# Altium PCB PCB1.PcbDoc
Units mil, origin at the board's own origin, x right, y up, seen from the top; angles counter-clockwise.
Board outline 4724.41 x 5511.81 mil, 4 copper layers (Top Layer, Layer 1, Layer 2, Bottom Layer), stack 23.756 mil thick; 86 components, 83 nets, 358 pads, 500 vias.
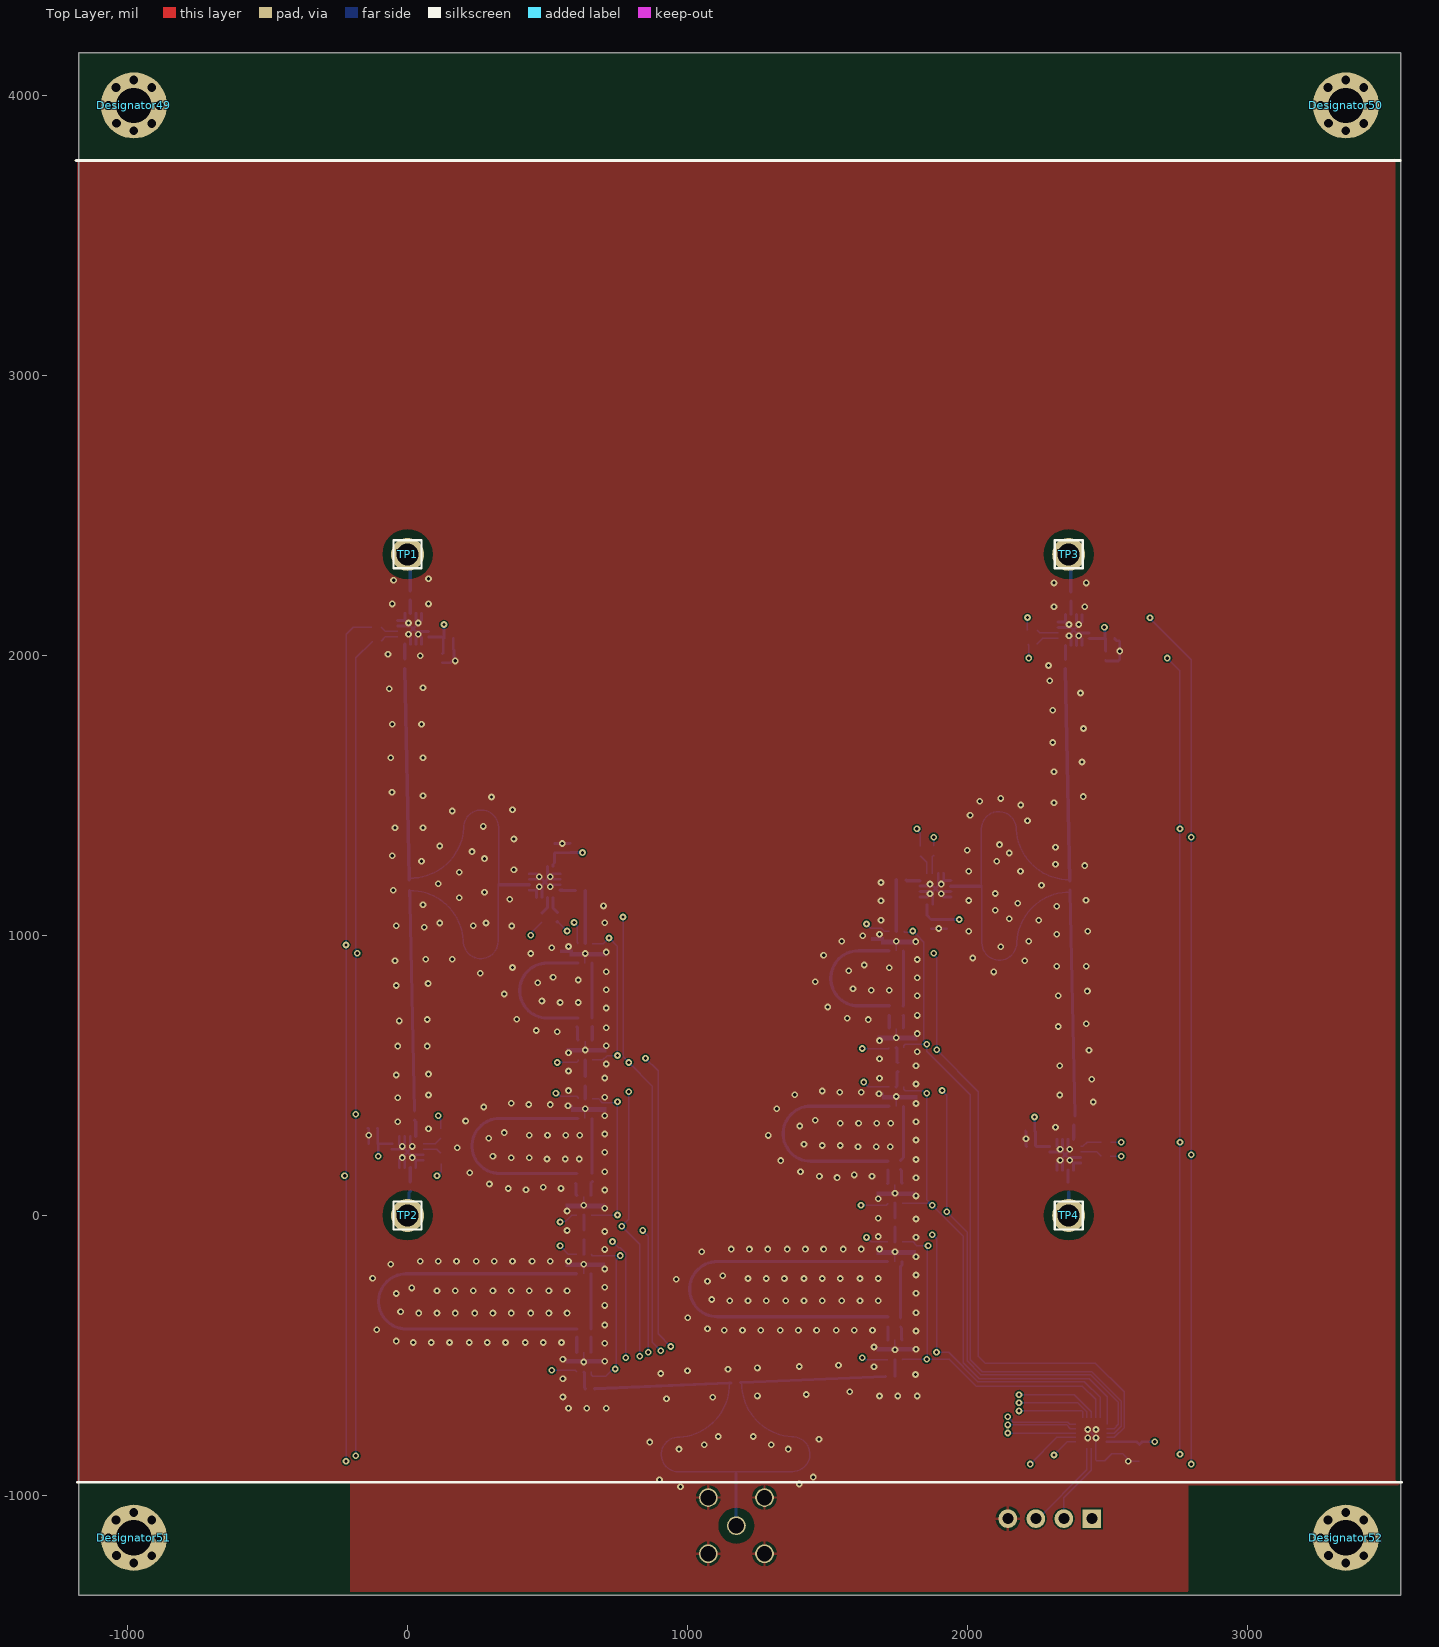
[diagram p0: Top Layer view]
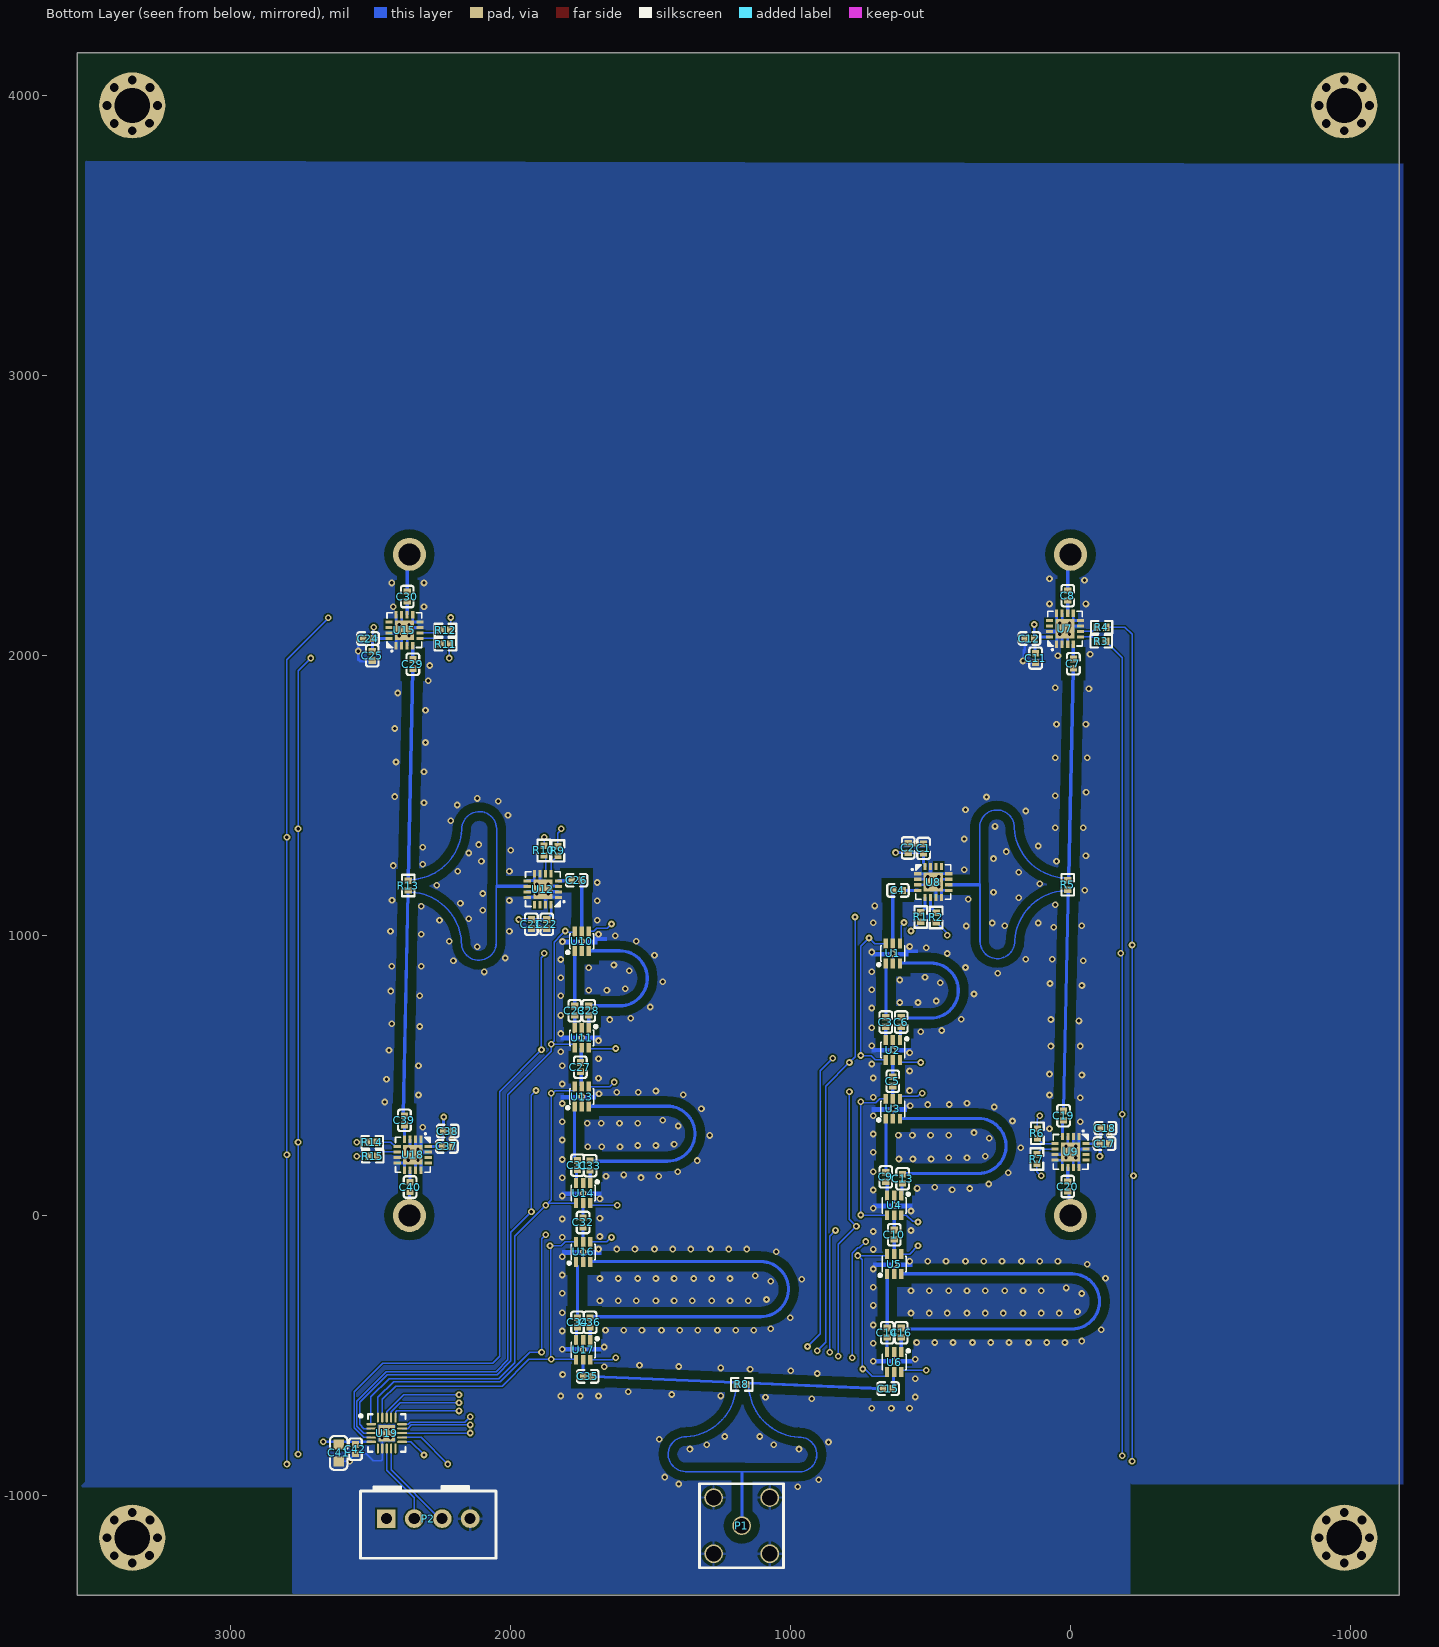
[diagram p1: Bottom Layer view, seen from below]
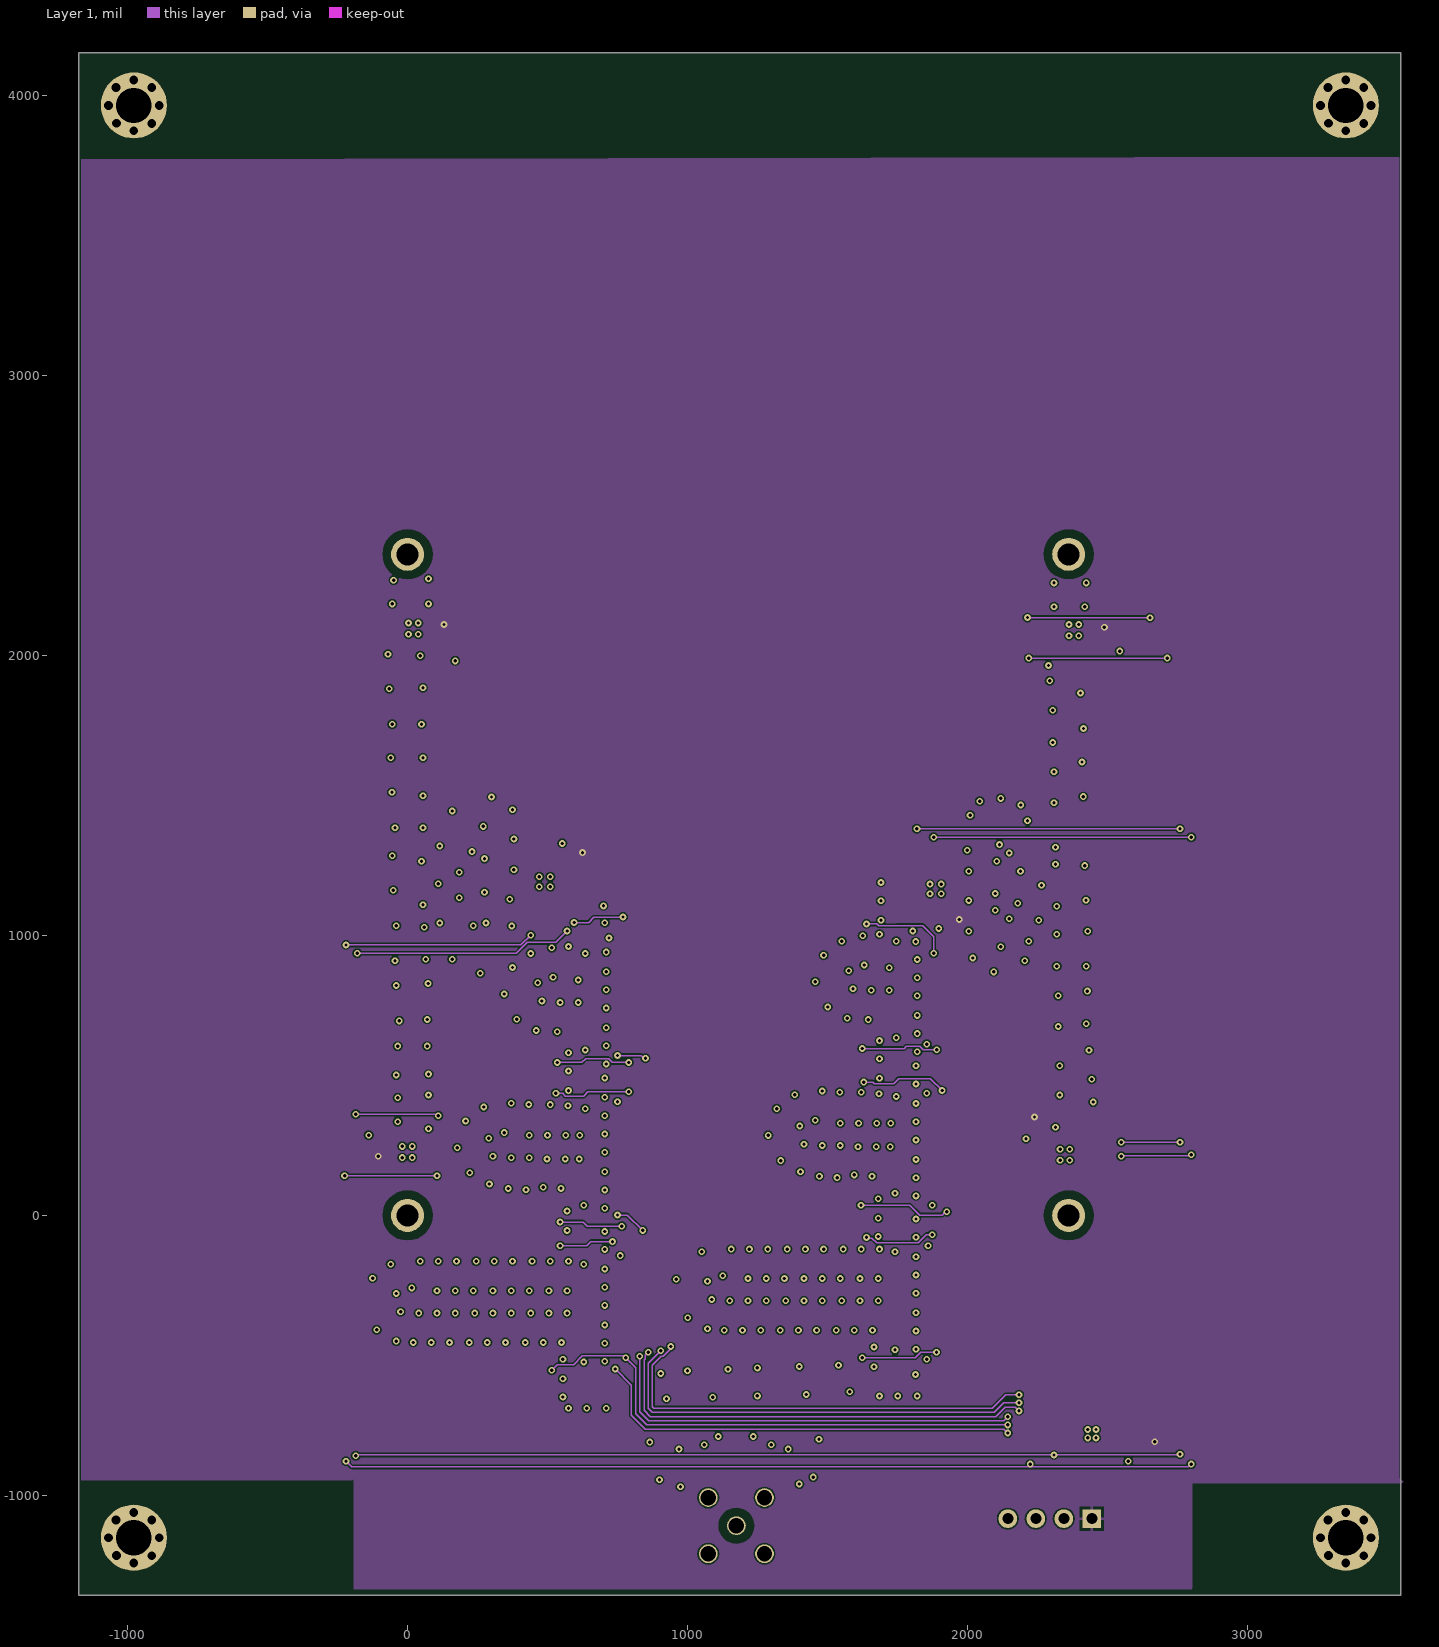
[diagram p2: Layer 1]
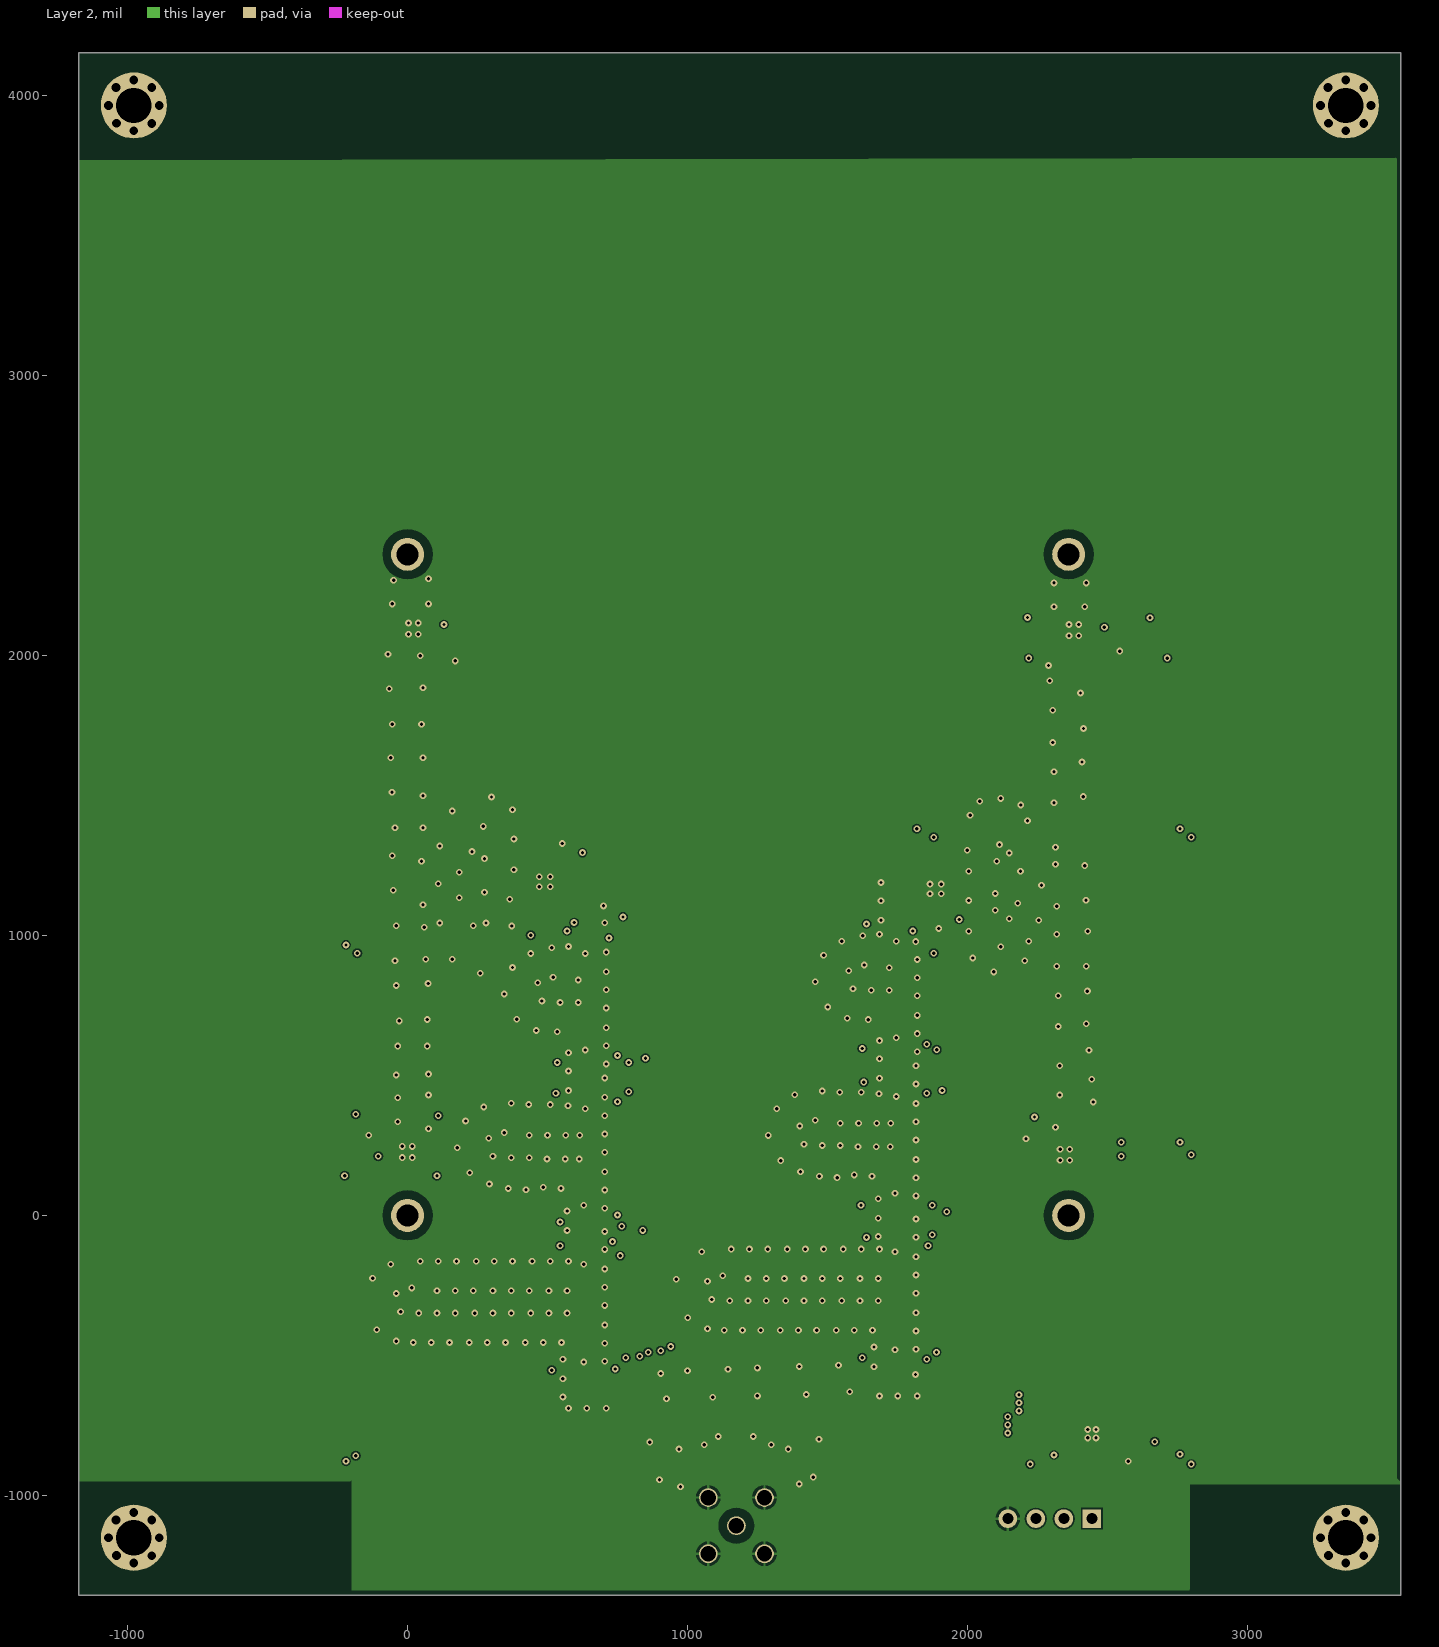
[diagram p3: Layer 2]
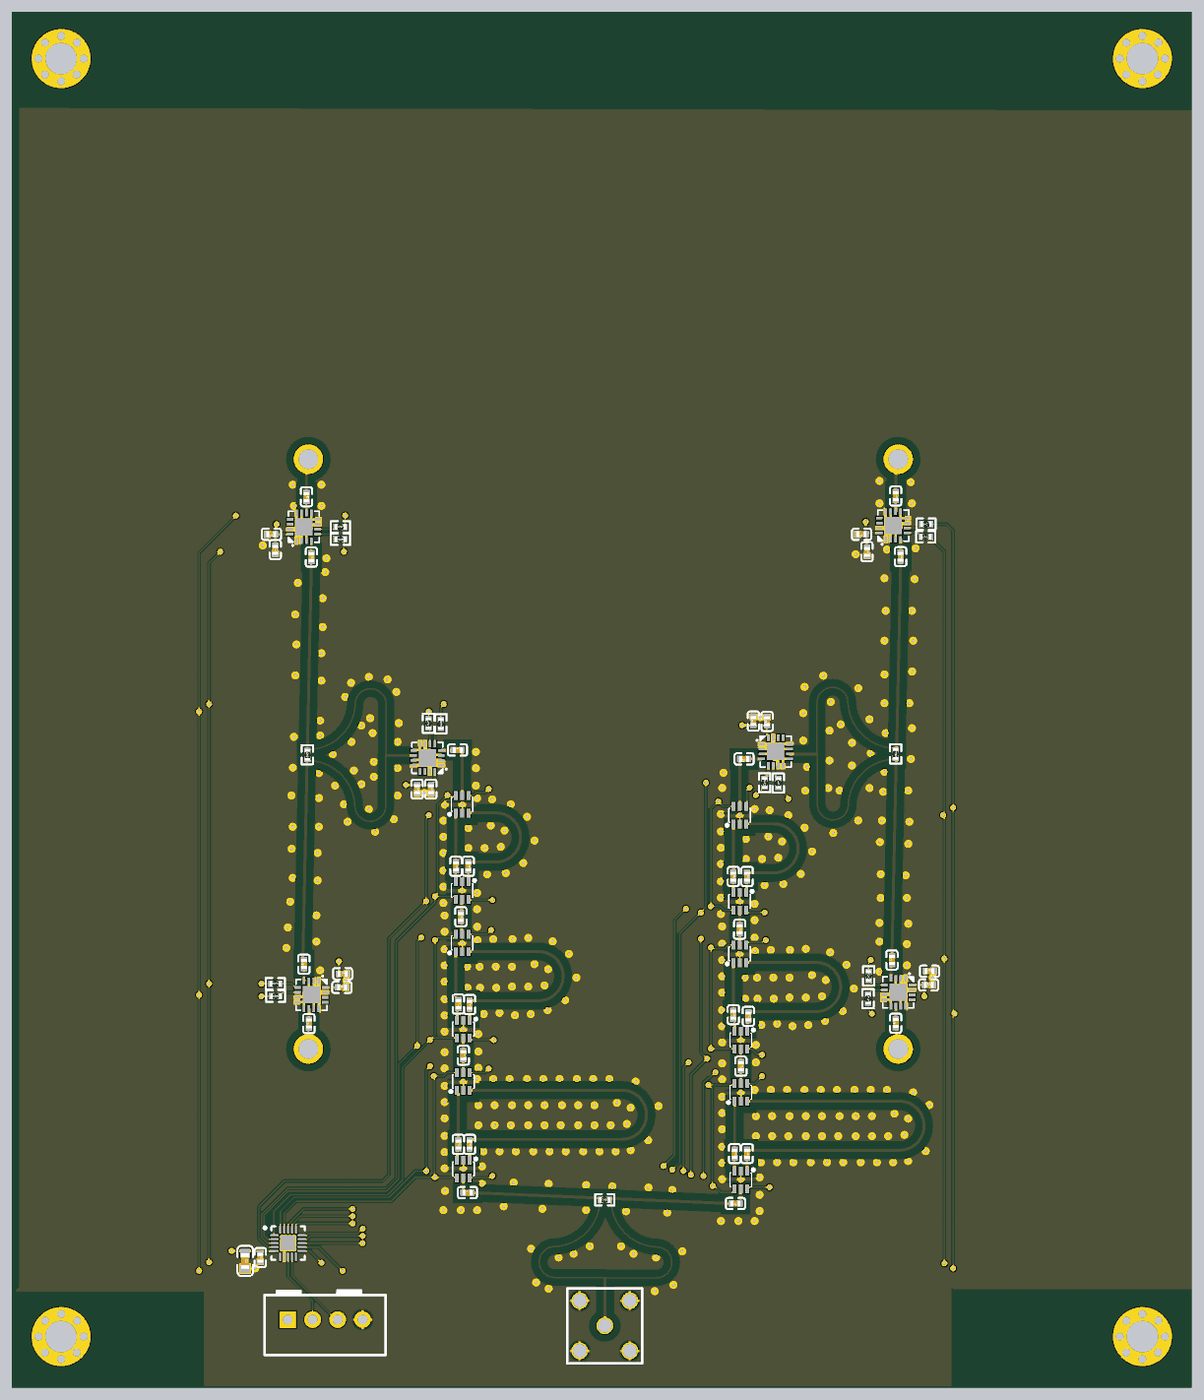
[diagram p4: 3D render of the assembled board from below, using the file's embedded part models]

## Layer stack, top to bottom
Top Solder: solder mask 0.4, Solder Resist, Dk 3.5
Top Layer: signal copper 1.4
Dielectric 2: prepreg 2.8, PP-006, Dk 4.1
Layer 1: signal copper 1.378
Dielectric 1: dielectric 12.6, FR-4, Dk 4.8
Layer 2: signal copper 1.378
Dielectric 3: prepreg 2.8, PP-006, Dk 4.1
Bottom Layer: signal copper 1.4
Bottom Solder: solder mask 0.4, Solder Resist, Dk 3.5

## Board outline
-1175,-1357.32 3549.41,-1357.32 3549.41,4154.49 -1175,4154.49

## Design rules (kind name [scope] priority, off if disabled: settings)
Clearance [All vs InNetClass('RF')] p1: gap=5 ignorepadtopadclearanceinfootprint=FALSE except(30: Arc-Poly Track-Poly SMDPad-Poly THPad-Poly Via-Poly Fill-Poly Poly-Poly Poly-Region Poly-Text Poly-Hole)
Clearance Clearance_1 [All] p2: gap=5 ignorepadtopadclearanceinfootprint=FALSE
PlaneConnect [All] p1: planeconnectstyle=Direct reliefexpansion=20 reliefentries=4 reliefconductorwidth=10 reliefairgap=10
PolygonConnect [All] p1: thpad.connectstyle=Relief thpad.reliefconductorwidth=10 thpad.reliefentries=4 thpad.polygonreliefangle="90 Angle" thpad.airgapwidth=10 smdpad.connectstyle=Direct smdpad.reliefconductorwidth=10 smdpad.reliefentries=4 smdpad.polygonreliefangle="90 Angle" smdpad.airgapwidth=10 via.connectstyle=Direct via.reliefconductorwidth=10 via.reliefentries=4 via.polygonreliefangle="90 Angle" via.airgapwidth=10
RoutingVias [All] p1: holewidth=12 width=24 viastyle="Through Hole" minholewidth=10 minwidth=18 maxholewidth=12 maxwidth=24
SolderMaskExpansion [All] p1: expansion=4 istentingtop=FALSE
Width [All] p1: maxlimit=100 minlimit=5 preferedwidth=11.55
29 further rules are at their usual default settings.

## Classes and differential pairs
net class RF: NetC3_1 NetC3_2 NetC4_1 NetC4_2 NetC5_1 NetC5_2 NetC6_1 NetC6_2 NetC7_1 NetC7_2 NetC8_1 NetC8_2 NetC9_1 NetC9_2 NetC10_1 NetC10_2 NetC13_1 NetC13_2 NetC14_1 NetC14_2 NetC15_1 NetC15_2 NetC16_1 NetC16_2 NetC19_1 NetC20_1 NetC20_2 NetC23_1 NetC23_2 NetC26_1 NetC26_2 NetC27_1 NetC27_2 NetC28_1 NetC28_2 NetC29_1 NetC29_2 NetC30_1 NetC30_2 NetC31_1 NetC31_2 NetC32_1 NetC32_2 NetC33_1 NetC33_2 NetC34_1 NetC34_2 NetC35_1 NetC36_1 NetC36_2 NetC39_1 NetC40_1 NetC40_2

## Components (designator, comment, footprint, x,y, rotation, side; value= is the part's Value field where it differs from the comment)
C1 "100pF (101) 5% 50V" 0402_C 525,1311.38 r90 bottom
C2 "10nF (103) 10% 50V" 0402_C 580,1313.11 r90 bottom
C3 "10pF (100) 5% 50V" 0402_C 660,690.94 r270 bottom
C4 "10pF (100) 5% 50V" 0402_C 616.73,1161.38 r0 bottom
C5 "10pF (100) 5% 50V" 0402_C 635,479.21 r270 bottom
C6 "10pF (100) 5% 50V" 0402_C 605,690.94 r270 bottom
C7 "10pF (100) 5% 50V" 0402_C -10.16,1971.38 r270 bottom
C8 "10pF (100) 5% 50V" 0402_C 9.84,2214.65 r270 bottom
C9 "10pF (100) 5% 50V" 0402_C 660,137.68 r270 bottom
C10 "10pF (100) 5% 50V" 0402_C 630,-69.06 r270 bottom
C11 "10nF (103) 10% 50V" 0402_C 124.84,1991.38 r270 bottom
C12 "100pF (101) 5% 50V" 0402_C 146.58,2061.38 r0 bottom
C13 "10pF (100) 5% 50V" 0402_C 600,130.94 r270 bottom
C14 "10pF (100) 5% 50V" 0402_C 655,-419.06 r270 bottom
C15 "10pF (100) 5% 50V" 0402_C 651.73,-619.05 r0 bottom
C16 "10pF (100) 5% 50V" 0402_C 605,-419.06 r270 bottom
C17 "100pF (101) 5% 50V" 0402_C -121.73,256.38 r180 bottom
C18 "10nF (103) 10% 50V" 0402_C -125,311.38 r180 bottom
C19 "10pF (100) 5% 50V" 0402_C 25,356.38 r90 bottom
C20 "10pF (100) 5% 50V" 0402_C 10,103.11 r90 bottom
C21 "100pF (101) 5% 50V" 0402_C 1926.61,1040.75 r270 bottom
C22 "10nF (103) 10% 50V" 0402_C 1871.61,1040.75 r270 bottom
C23 "10pF (100) 5% 50V" 0402_C 1771.54,731.38 r270 bottom
C24 "100pF (101) 5% 50V" 0402_C 2510,2061.38 r0 bottom
C25 "10nF (103) 10% 50V" 0402_C 2495,1999.65 r270 bottom
C26 "10pF (100) 5% 50V" 0402_C 1764.88,1197.48 r180 bottom
C27 "10pF (100) 5% 50V" 0402_C 1751.54,529.65 r270 bottom
C28 "10pF (100) 5% 50V" 0402_C 1721.54,731.38 r270 bottom
C29 "10pF (100) 5% 50V" 0402_C 2350,1969.65 r270 bottom
C30 "10pF (100) 5% 50V" 0402_C 2370,2211.38 r270 bottom
C31 "10pF (100) 5% 50V" 0402_C 1761.54,179.65 r270 bottom
C32 "10pF (100) 5% 50V" 0402_C 1741.54,-25.35 r270 bottom
C33 "10pF (100) 5% 50V" 0402_C 1716.54,177.92 r270 bottom
C34 "10pF (100) 5% 50V" 0402_C 1761.54,-382.08 r270 bottom
C35 "10pF (100) 5% 50V" 0402_C 1724.8,-575.35 r180 bottom
C36 "10pF (100) 5% 50V" 0402_C 1716.54,-382.08 r270 bottom
C37 "100pF (101) 5% 50V" 0402_C 2228.27,246.38 r180 bottom
C38 "10nF (103) 10% 50V" 0402_C 2225,301.38 r180 bottom
C39 "10pF (100) 5% 50V" 0402_C 2380,339.65 r90 bottom
C40 "10pF (100) 5% 50V" 0402_C 2360,101.38 r90 bottom
C41 "22uF (226) 20% 6.3V" 0603_C 2615,-848.94 r270 bottom
C42 "100nF (104) 10% 16V" 0402_C 2555,-835.35 r270 bottom
Designator49 "Comment" 螺丝固定孔M3 -978.15,3966.26 r0 top
Designator50 "Comment" 螺丝固定孔M3 3352.56,3966.26 r0 top
Designator51 "Comment" 螺丝固定孔M3 -978.15,-1151.85 r0 top
Designator52 "Comment" 螺丝固定孔M3 3352.56,-1151.85 r0 top
P1 "SMA-KHD" SMA-KHD 1275.39,-1209.02 r180 bottom
P2 "XH2.54-4PIN直插" XH2.54-4PIN直插 2445,-1083.62 r180 bottom
R1 "1KΩ (1001) ±1%" 0402_R 535,1066.38 r270 bottom
R2 "1KΩ (1001) ±1%" 0402_R 480,1064.65 r270 bottom
R3 "1KΩ (1001) ±1%" 0402_R -110.16,2051.38 r180 bottom
R4 "1KΩ (1001) ±1%" 0402_R -111.06,2101.75 r180 bottom
R5 "100Ω (1000) ±1%" 0402_R 10,1181.38 r90 bottom
R6 "1KΩ (1001) ±1%" 0402_R 118.27,293.11 r90 bottom
R7 "1KΩ (1001) ±1%" 0402_R 120,201.38 r270 bottom
R8 "100Ω (1000) ±1%" 0402_R 1175,-603.62 r180 bottom
R9 "1KΩ (1001) ±1%" 0402_R 1831.61,1302.48 r90 bottom
R10 "1KΩ (1001) ±1%" 0402_R 1881.61,1304.21 r90 bottom
R11 "1KΩ (1001) ±1%" 0402_R 2233.27,2041.38 r180 bottom
R12 "1KΩ (1001) ±1%" 0402_R 2233.27,2091.38 r180 bottom
R13 "100Ω (1000) ±1%" 0402_R 2366.61,1178.58 r90 bottom
R14 "1KΩ (1001) ±1%" 0402_R 2495,261.38 r0 bottom
R15 "1KΩ (1001) ±1%" 0402_R 2493.27,211.38 r0 bottom
TP1 "TP-1" 040_TESTPOINT 0,2362.2 r0 top
TP2 "TP-1" 040_TESTPOINT 0,0 r0 top
TP3 "TP-1" 040_TESTPOINT 2362.2,2362.2 r0 top
TP4 "TP-1" 040_TESTPOINT 2362.2,0 r0 top
U1 "XA213-G4J" SOT-363_L2.0-W1.3-P0.65-LS2.1-BR 635,935.94 r270 bottom
U2 "XA213-G4J" SOT-363_L2.0-W1.3-P0.65-LS2.1-BR 635,590.94 r90 bottom
U3 "XA213-G4J" SOT-363_L2.0-W1.3-P0.65-LS2.1-BR 635,380.94 r270 bottom
U4 "XA213-G4J" SOT-363_L2.0-W1.3-P0.65-LS2.1-BR 630,35.94 r90 bottom
U5 "XA213-G4J" SOT-363_L2.0-W1.3-P0.65-LS2.1-BR 630,-174.06 r270 bottom
U6 "XA213-G4J" SOT-363_L2.0-W1.3-P0.65-LS2.1-BR 630,-524.06 r90 bottom
U7 "AT2401C" QFN-16_L3.0-W3.0-P0.50-BL-EP1.7 19.84,2096.38 r180 bottom
U8 "AT2401C" QFN-16_L3.0-W3.0-P0.50-BL-EP1.7 490.41,1191.22 r270 bottom
U9 "AT2401C" QFN-16_L3.0-W3.0-P0.50-BL-EP1.7 -0.16,226.79 r0 bottom
U10 "XA213-G4J" SOT-363_L2.0-W1.3-P0.65-LS2.1-BR 1746.54,979.65 r270 bottom
U11 "XA213-G4J" SOT-363_L2.0-W1.3-P0.65-LS2.1-BR 1746.54,634.65 r90 bottom
U12 "AT2401C" QFN-16_L3.0-W3.0-P0.50-BL-EP1.7 1885.23,1165.91 r90 bottom
U13 "XA213-G4J" SOT-363_L2.0-W1.3-P0.65-LS2.1-BR 1746.54,424.65 r270 bottom
U14 "XA213-G4J" SOT-363_L2.0-W1.3-P0.65-LS2.1-BR 1741.54,79.65 r90 bottom
U15 "AT2401C" QFN-16_L3.0-W3.0-P0.50-BL-EP1.7 2380,2091.38 r180 bottom
U16 "XA213-G4J" SOT-363_L2.0-W1.3-P0.65-LS2.1-BR 1741.54,-130.35 r270 bottom
U17 "XA213-G4J" SOT-363_L2.0-W1.3-P0.65-LS2.1-BR 1741.54,-480.35 r90 bottom
U18 "AT2401C" QFN-16_L3.0-W3.0-P0.50-BL-EP1.7 2350.16,216.79 r0 bottom
U19 "STC8G1K08-QFN20" QFN20(3x3) 2443.43,-777.61 r180 bottom

## Footprints (in the part's own frame and the unit in brackets; to place one, negate y for a bottom-side part, rotate by r counter-clockwise, add the part's x,y. Pads: shape width x height; smd on the part's side, far side on the other; paste and mask are expansions set on the pad)
040_TESTPOINT [mm] "040_TESTPOINT"
  round 3 hole 2: A(0,0)
  silkscreen extent -1.27,-1.27 1.27,1.27
0402_C [mm]
  rect 0.6x0.65 smd mask+0.051: 1(-0.425,0) 2(0.425,0)
  silkscreen extent -0.97,-0.58 0.97,0.58, body extent -0.48,-0.3 0.52,0.3, height 0.2
0402_R [mm]
  rect 0.6x0.65 smd mask+0.051: 1(-0.425,0) 2(0.425,0)
  silkscreen extent -0.97,-0.58 0.97,0.58, body extent -0.57,-0.27 0.58,0.28, height 0.41
0603_C [mm]
  rect 0.93x0.98 smd: 1(-0.77,0) 2(0.77,0)
  silkscreen extent -1.53,-0.79 1.54,0.79, body extent -0.8,-0.4 0.8,0.4, height 0.3
QFN20(3x3) [mm] "QFN, 20-Leads, Body 3.00x3.00mm, Pitch 0.40mm, Thermal Pad 1.50x1.50mm, IPC Medium Density"
  oval 0.9x0.2 smd: 1(-1.4,0.8) 2(-1.4,0.4) 3(-1.4,0) 4(-1.4,-0.4) 5(-1.4,-0.8) 11(1.4,-0.8) 12(1.4,-0.4) 13(1.4,0) 14(1.4,0.4) 15(1.4,0.8)
  oval 0.2x0.9 smd: 6(-0.8,-1.4) 7(-0.4,-1.4) 8(0,-1.4) 9(0.4,-1.4) 10(0.8,-1.4) 16(0.8,1.4) 17(0.4,1.4) 18(0,1.4) 19(-0.4,1.4) 20(-0.8,1.4)
  rect 1.5x1.5 smd: 21(0,0)
  silkscreen extent -2.48,-1.7 1.7,1.7, body extent -1.55,-1.55 1.55,1.55, height 0.8
QFN-16_L3.0-W3.0-P0.50-BL-EP1.7 [mm]
  rect 0.28x0.665 smd: 1(-0.75,-1.407) 2(-0.25,-1.407) 3(0.25,-1.407) 4(0.75,-1.407) 9(0.75,1.407) 10(0.25,1.407) 11(-0.25,1.407) 12(-0.75,1.407)
  rect 0.665x0.28 smd: 5(1.407,-0.75) 6(1.407,-0.25) 7(1.407,0.25) 8(1.407,0.75) 13(-1.407,0.75) 14(-1.407,0.25) 15(-1.407,-0.25) 16(-1.407,-0.75)
  rect 1.75x1.75 smd: 17(0,0)
  silkscreen extent -1.58,-1.98 1.58,1.58
SMA-KHD [mm] "正插SMA射频连接器"
  round 1.7 hole 1.4: 0(0,0) 0(0,5.1) 0(5.1,0) 0(5.1,5.1) 1(2.55,2.55)
  silkscreen extent -1.27,-1.27 6.35,6.35
SOT-363_L2.0-W1.3-P0.65-LS2.1-BR [mm]
  rect 0.9x0.4 smd: 1(0.9,-0.65) 2(0.9,0) 3(0.9,0.65) 4(-0.9,0.65) 5(-0.9,0) 6(-0.9,-0.65)
  silkscreen extent -0.7,-1.4 1.14,1.1
XH2.54-4PIN直插 [mm]
  rect 1.7x1.7 hole 1: 1(0,0)
  round 1.7 hole 1: 2(2.54,0) 3(5.08,0) 4(7.62,0)
  silkscreen extent -2.35,-3.6 9.95,2.95
螺丝固定孔M3 [mm]
  round 1.2 hole 0.8: 1(-2.3,0) 1(-1.62,1.62) 1(-1.578,-1.622) 1(0,-2.3) 1(0,2.3) 1(1.63,1.62) 1(1.632,-1.631) 1(2.3,0)
  round 6 hole 3.2: 1(0,0)

## Part data
C1 C12 C17 C21 C24 C37: library part "0402 100pF (101) 5% 50V", "贴片电容", Package=0402, SuppliersPartNumber=C1546, ComponentLink1Description=供应商链接, ComponentLink1URL=http://www.szlcsc.com/product/details_1898.html, Supplier=LC
C2 C11 C18 C22 C25 C38: library part "0402 10nF (103) 10% 50V", "贴片电容", Package=0402, SuppliersPartNumber=C15195, ComponentLink1Description=供应商链接, ComponentLink1URL=http://www.szlcsc.com/product/details_15869.html, Supplier=LC
C3 C4 C5 C6 C7 C8 C9 C10 C13 C14 C15 C16 C19 C20 C23 C26 C27 C28 C29 C30 C31 C32 C33 C34 C35 C36 C39 C40: library part "0402 10pF (100) 5% 50V", "贴片电容", Package=0402, SuppliersPartNumber=C32949, ComponentLink1Description=供应商链接, ComponentLink1URL=http://www.szlcsc.com/product/details_33914.html, Supplier=LC
C41: library part "0603 22uF (226) 20% 6.3V", "贴片电容", Package=0603, SuppliersPartNumber=C59461, ComponentLink1Description=供应商链接, ComponentLink1URL=http://www.szlcsc.com/product/details_60514.html, Supplier=LC
C42: library part "0402 100nF (104) 10% 16V", "贴片电容", Package=0402, SuppliersPartNumber=C1525, ComponentLink1Description=供应商链接, ComponentLink1URL=http://www.szlcsc.com/product/details_1877.html, Supplier=LC
P1: "SMA正插射频连接器"
P2: "XH2.54-4PIN直插连接器"
R1 R2 R3 R4 R6 R7 R9 R10 R11 R12 R14 R15: library part "0402 1KΩ (1001) 1%", "贴片电阻", Package=0402, SuppliersPartNumber=C11702, ComponentLink1Description=供应商链接, ComponentLink1URL=http://www.szlcsc.com/product/details_12256.html, Supplier=LC
R5 R8 R13: library part "0402 100Ω (1000) 1%", "贴片电阻", Package=0402, SuppliersPartNumber=C25076, ComponentLink1Description=供应商链接, ComponentLink1URL=http://www.szlcsc.com/product/details_25819.html, Supplier=LC
U1 U2 U3 U4 U5 U6 U10 U11 U13 U14 U16 U17: BOM_JLCPCB Part Class="Extended Part", BOM_Manufacturer=XINLUDA(信路达), BOM_Manufacturer Part=XA213-G4J, BOM_Supplier=LCSC, BOM_Supplier Part=C556294, Contributor=LCSC, spicePre=U, spiceSymbolName=XA213-G4J
U7 U8 U9 U12 U15 U18: BOM_JLCPCB Part Class="Extended Part", BOM_Manufacturer=杭州中科微, BOM_Manufacturer Part=AT2401C, BOM_Supplier=LCSC, BOM_Supplier Part=C783588, Contributor=LCSC, spicePre=U, spiceSymbolName=AT2401C
U19: "超小封装8位51单片机", SuppliersPartNumber=库存, Supplier=STC

## Via types
v1: diameter 24, hole 12, Top Layer to Bottom Layer, 500 vias

## Nets (pads, with @x,y where several pads share a name; then routed paths per layer and width w, separated by ;. In a path a pad name is that pad's centre, name@x,y a point inside that pad or via, vN(x,y) a via of type N, cw(c..) or ccw(c..) an arc to the next point about the centre after c; other vN are vias at no path point)
ctrl1N: U1.4 U2.6 U19.17 | length 4069.1
  Layer 1 w5: v1(535,546.38) 622.08,546.38 636.14,560.44 718.08,560.44 732.14,546.38 v1(790,546.38) ; v1(595,1046.38) 647.29,1046.38 665.93,1065.01 v1@776.37,1065.01 ; v1(905,-483.62) 860,-528.62 860,-689.84 873.79,-703.62 2096.21,-703.62 2130.21,-669.62 v1(2185,-669.62)
  Bottom Layer w5: v1(535,546.38) 604.03,546.38 609.41,551.75 U2.6 ; v1(595,1046.38) 605.51,1035.87 605.51,975.28 U1.4 ; v1(770,1066.38) 770,566.38 v1(790,546.38) 875,461.38 875,-453.62 v1(905,-483.62) ; v1(2185,-669.62) 2395.03,-669.62 2427.68,-702.27 U19.17
ctrl1P: U1.6 U2.4 U19.18 | length 3649.3
  Layer 1 w5: v1(750,571.38) 834.86,571.38 844.86,561.38 v1(850,561.38) ; v1(940,-468.62) 940,-476.2 913.08,-503.12 906.71,-503.12 875,-534.84 875,-683.62 880,-688.62 2090,-688.62 2138,-640.62 v1(2185,-640.62)
  Bottom Layer w5: U2.4 696.99,555.51 712.86,571.38 v1(750,571.38) 750,961.38 v1(720,991.38) 700,971.38 U1.6 ; v1(850,561.38) 895,516.38 895,-423.62 v1(940,-468.62) ; v1(2185,-640.62) 2381.78,-640.62 2443.43,-702.27 U19.18
ctrl2N: U3.4 U4.6 U19.15 | length 3432.4
  Layer 1 w5: v1(530,436.38) 554.14,436.38 564.08,426.44 629.08,426.44 644.01,441.38 v1(790,441.38) ; v1(545,-23.62) 626.86,-23.62 641.36,-38.12 764.5,-38.12 v1(765,-38.62) v1@770,-33.62 ; v1(830,-503.62) 830,-702.26 861.36,-733.62 2131,-733.62 v1(2145,-719.62)
  Bottom Layer w5: v1(530,436.38) 535.14,436.38 545.07,426.44 604.03,426.44 609.41,421.07 U3.4 ; v1(545,-23.62) 546.98,-21.64 564.5,-21.64 586.66,0.51 U4.6 ; v1(790,441.38) 790,-13.62 v1(765,-38.62) 830,-103.62 v1(830,-503.62) ; v1(2145,-719.62) 2164,-738.62 2359,-738.62 2366.49,-746.11 U19.15
ctrl2P: U3.6 U4.4 U19.16 | length 2991.1
  Layer 1 w5: v1(750,1.38) 785,1.38 v1(840,-53.62) ; v1(750,406.38) v1@755,401.38 ; v1(860,-488.62) 849.5,-499.12 849.5,-511.7 845,-516.2 845,-696.05 867.57,-718.62 2102.43,-718.62 2136.21,-684.84 2171.21,-684.84 v1(2185,-698.62)
  Bottom Layer w5: U4.4 749.13,0.51 v1(750,1.38) v1(750,406.38) 744.86,406.38 740.86,402.38 696.52,402.38 682.52,416.38 U3.6 ; v1(840,-53.62) 860,-73.62 v1(860,-488.62) ; v1(2185,-698.62) 2408.28,-698.62 2411.93,-702.27 U19.16
ctrl3N: U5.4 U6.6 U19.14 | length 2898.3
  Layer 1 w5: v1(515,-553.62) 535.07,-533.56 592.92,-533.56 624.42,-502.06 773.43,-502.06 v1(780,-508.62) 815,-543.62 815,-708.47 855.15,-748.62 v1(2145,-748.62) ; v1(545,-108.62) 640.07,-108.62 655.07,-93.62 v1(732.07,-93.62) v1@735,-96.55
  Bottom Layer w5: v1(515,-553.62) 599.03,-553.62 604.41,-559 U6.6 ; v1(545,-108.62) 575,-138.62 U5.4 ; v1(732.07,-93.62) 754.85,-116.4 760.36,-116.4 780,-136.04 v1(780,-508.62) ; v1(2145,-748.62) 2354.86,-748.62 2368.09,-761.86 U19.14
ctrl3P: U5.6 U6.4 U19.13 | length 2427.8
  Layer 1 w5: v1(742.43,-548.62) 800,-606.19 800,-714.69 848.93,-763.62 2131,-763.62 v1(2145,-777.62)
  Bottom Layer w5: U6.4 655.59,-569.33 660.97,-574.7 708.78,-574.7 734.86,-548.62 v1(742.43,-548.62) 745,-546.05 745,-158.62 v1(760,-143.62) ; U5.6 660.59,-143.62 v1@755,-143.62 ; v1(2145,-777.62) U19.13
ctrl4N: U10.4 U11.6 U19.4 | length 3076
  Layer 1 w5: v1(1625,596.38) 1773.91,596.38 1781.69,604.15 1829.96,604.15 1842.23,591.88 v1(1890.5,591.88) v1@1895,596.38 ; v1(1640,1041.38) 1677.23,1041.38 1683.46,1035.15 1747.9,1035.15 1748.63,1035.88 1840.5,1035.88 1880,996.38 v1(1880,936.38) v1@1880,931.38
  Bottom Layer w5: v1(1625,596.38) 1718.1,596.38 U11.6 ; v1(1640,1041.38) 1654.96,1026.41 1692.35,1026.41 1703.68,1015.08 U10.4 ; v1(1880,936.38) 1880,931.24 1890.5,920.74 v1(1890.5,591.88) 2040,442.38 2040,-503.62 2065,-528.62 2457.78,-528.62 2560,-630.84 2560,-758.62 2525.27,-793.35 U19.4
ctrl4P: U10.6 U11.4 U19.3 | length 2499.2
  Bottom Layer w5: U11.4 1772.13,606 1777.5,611.38 v1(1855,611.38) ; U10.6 1775.83,1011.38 1802.07,1011.38 1805,1014.31 v1(1805,1016.38) 1817.4,1003.97 1845,976.38 1845,623.81 1855,613.81 v1(1855,611.38) ; U19.3 2525.27,-777.61 2550,-752.87 2550,-663.27 2445.36,-558.62 2052.57,-558.62 2010,-516.05 2010,431.38 1855,586.38 v1(1855,611.38)
ctrl5N: U13.4 U14.6 U19.2 | length 2564.1
  Layer 1 w5: v1(1620,36.38) 1794.89,36.38 1829.89,1.38 1910,1.38 1921.29,12.67 v1(1926.29,12.67) ; v1(1630,476.38) 1661.76,476.38 1667.99,470.15 1736.8,470.15 1755.8,489.15 1867.23,489.15 v1(1910,446.38)
  Bottom Layer w5: v1(1620,36.38) 1710.57,36.38 1715.94,41.75 U14.6 ; v1(1630,476.38) 1646.29,460.08 U13.4 ; v1(1910,446.38) 1926.29,430.09 v1(1926.29,12.67) 2000,-61.04 2000,-520.19 2048.43,-568.62 2441.21,-568.62 2540,-667.41 2540,-747.13 2525.27,-761.86 U19.2
ctrl5P: U13.6 U14.4 U19.1 | length 1890
  Bottom Layer w5: U14.4 1862.02,44.22 1869.86,36.38 v1(1875,36.38) ; U13.6 1772.13,450.24 1777.5,444.87 1841.37,444.87 1849.86,436.38 v1(1855,436.38) 1855,56.38 v1(1875,36.38) ; U19.1 2498.67,-746.11 2500,-744.78 2500,-648.62 2435,-583.62 2042.22,-583.62 1985,-526.4 1985,-73.62 v1(1875,36.38)
ctrl6N: U16.4 U17.6 U19.20 | length 1854.7
  Layer 1 w5: v1(1625,-508.62) 1813.34,-508.62 1833.34,-488.62 v1(1890,-488.62) ; v1(1640,-78.62) 1642.27,-80.89 1659.5,-80.89 1675.96,-97.35 1824.61,-97.35 1853.34,-68.62 v1(1875,-68.62)
  Bottom Layer w5: v1(1625,-508.62) 1630.14,-508.62 1637.3,-515.78 U17.6 ; v1(1640,-78.62) 1656.29,-94.92 U16.4 ; v1(1875,-68.62) 1890,-83.62 v1(1890,-488.62) 1933.08,-488.62 2038.08,-593.62 2418.08,-593.62 2474.92,-650.47 U19.20
ctrl6P: U16.6 U17.4 U19.19 | length 1323
  Bottom Layer w5: U17.4 1769.29,-513.62 v1(1855,-513.62) ; U16.6 1806.03,-94.92 1819.73,-108.62 v1(1860,-108.62) 1857.5,-111.12 1857.5,-511.12 v1(1855,-513.62) ; U19.19 2459.18,-657.8 2411.32,-609.94 2031.32,-609.94 1935,-513.62 v1(1855,-513.62)
GND: C1.2 C2.2 C11.2 C12.2 C17.2 C18.2 C21.2 C22.2 C24.2 C25.2 C37.2 C38.2 C41.2 C42.2 P1.0 P2.4 U1.2 U2.2 U3.2 U4.2 U5.2 U6.2 U7.1 U7.2 U7.3 U7.7 U7.8 U7.9 U7.11 U7.12 U7.15 U7.17 U8.1 U8.2 U8.3 U8.7 U8.8 U8.9 U8.11 U8.12 U8.15 U8.17 U9.1 U9.2 U9.3 U9.7 U9.8 U9.9 U9.11 U9.12 U9.15 U9.17 U10.2 U11.2 U12.1 U12.2 U12.3 U12.7 U12.8 U12.9 U12.11 U12.12 U12.15 U12.17 U13.2 U14.2 U15.1 U15.2 U15.3 U15.7 U15.8 U15.9 U15.11 U15.12 U15.15 U15.17 U16.2 U17.2 U18.1 U18.2 U18.3 U18.7 U18.8 U18.9 U18.11 U18.12 U18.15 U18.17 U19.7 U19.21 | length 4013.6
  Bottom Layer w5: U5.2@629.41,-208.74 629.41,-175.48 cw(c631.43,-175.48) v1(630,-174.06) ; U4.2@629.41,67.13 cw(c627.98,65.7) 630,65.7 v1(630,35.94) ; v1(630,-524.06) U6.2 ; U3.2@633.82,346.57 633.82,378.09 cw(c637.85,378.09) v1(635,380.94) ; U1.2@633.82,901.89 633.82,933.09 cw(c637.85,933.09) v1(635,935.94) ; U2.2@634.41,622.44 634.41,592.37 ccw(c636.43,592.37) v1(635,590.94) ; U16.2@1740.94,-165.03 1740.94,-131.78 cw(c1742.96,-131.78) v1(1741.54,-130.35) ; v1(1741.54,-480.35) U17.2 ; v1(1741.54,79.65) U14.2@1741.54,109.41 ; U13.2@1745.35,390.28 1745.35,421.8 cw(c1749.39,421.8) v1(1746.54,424.65) ; U10.2@1745.35,945.6 1745.35,976.8 cw(c1749.39,976.8) v1(1746.54,979.65) ; U11.2@1745.94,666.15 1745.94,636.08 ccw(c1747.96,636.08) v1(1746.54,634.65) ; U19.21@2459.18,-793.35 U19.7 2459.18,-872.8 2462.93,-876.55 2491.58,-876.55 2516.05,-852.09 C42.2 2555.98,-852.09 2583.15,-879.25 C41.2
  Bottom Layer w10: C18.2 -138.46,308.11 v1(-138.46,286.38) C17.2 ; U9.15 U9.17@-10,236.63 ; U7.7 U7.17@10,2106.22 ; U7.8 -35.49,2125.83 U7.17@-9.61,2125.83 ; U9.12 -29.61,171.46 -29.61,197.34 U9.17@-10,216.95 ; U9.1 -29.61,282.12 -29.61,256.24 U9.17@-10,236.63 ; U9.11 U9.17@-10,216.95 ; U9.2 U9.17@-10,236.63 ; U7.9 -9.61,2151.71 U7.17@-9.61,2125.83 ; U9.3 9.69,236.63 U9.17 ; U7.3 10,2086.53 U7.17 ; U9.9 29.29,171.46 U9.17@29.29,197.34 ; U7.2 U7.17@29.69,2086.53 ; U7.11 U7.17@29.69,2106.22 ; U7.1 49.29,2041.04 49.29,2066.93 U7.17@29.69,2086.53 ; U7.12 49.29,2151.71 49.29,2125.83 U7.17@29.69,2106.22 ; U9.8 55.18,197.34 U9.17@29.29,197.34 ; U9.7 U9.17@9.69,216.95 ; U7.15 U7.17@29.69,2086.53 ; C11.2 153.27,1974.65 v1@165.86,1987.24 ; C12.2 163.31,2021.68 165.86,2019.13 v1@165.86,1987.24 ; v1(170,1981.38) 170,1983.09 v1@165.86,1987.24 ; U8.9 435.08,1161.77 U8.17@460.96,1161.77 ; U8.11 U8.17@480.57,1201.06 ; U8.12 435.08,1220.67 460.96,1220.67 U8.17@480.57,1201.06 ; U8.8 460.96,1135.89 U8.17@460.96,1161.77 ; U8.7 U8.17@480.57,1181.38 ; U8.15 U8.17@500.26,1201.06 ; C1.2@525.87,1328.98 v1(552.5,1328.98) 579.13,1328.98 C2.2 ; U8.3 500.26,1181.38 U8.17 ; U8.2 U8.17@500.26,1201.06 ; U8.1 545.75,1220.67 519.86,1220.67 U8.17@500.26,1201.06 ; U12.1@1831.2,1137.95 1831.27,1138.03 1857.16,1138.03 U12.17@1876.77,1157.64 ; U12.2@1831.2,1157.64 U12.17@1876.77,1157.64 ; U12.3@1831.2,1177.32 1876.77,1177.32 U12.17@1886.61,1167.48 ; C22.2 C21.2 ; U12.15@1876.77,1112.07 U12.17@1876.77,1157.64 ; U12.7@1896.45,1222.89 U12.17@1896.45,1177.32 ; U12.8@1916.14,1222.89 1916.06,1222.81 U12.17@1916.06,1196.93 ; U12.12@1942.02,1137.95 1941.94,1138.03 1916.06,1138.03 U12.17@1896.45,1157.64 ; U12.11@1942.02,1157.64 U12.17@1896.45,1157.64 ; U12.9@1942.02,1197.01 1941.94,1196.93 U12.17@1916.06,1196.93 ; C38.2 2209.9,299.74 v1(2209.9,273.88) 2209.9,248.01 C37.2 ; U18.15 U18.17@2340.31,226.63 ; U18.12 2320.71,161.46 2320.71,187.34 U18.17@2340.31,206.95 ; U18.1 2320.71,272.12 2320.71,246.24 U18.17@2340.31,226.63 ; U15.7 U15.17@2370.16,2101.22 ; U15.8 2324.67,2120.83 U15.17@2350.55,2120.83 ; U18.11 U18.17@2340.31,206.95 ; U18.2 U18.17@2340.31,226.63 ; U15.9 2350.55,2146.71 U15.17@2350.55,2120.83 ; U18.3 2360,226.63 U18.17 ; U15.3 2370.16,2081.53 U15.17 ; U18.9 2379.61,161.46 U18.17@2379.61,187.34 ; U15.2 U15.17@2389.84,2081.53 ; U15.11 U15.17@2389.84,2101.22 ; U18.8 2405.49,187.34 U18.17@2379.61,187.34 ; U18.7 U18.17@2360,206.95 ; U15.1 2409.45,2036.04 2409.45,2061.93 U15.17@2389.84,2081.53 ; U15.12 2409.45,2146.71 2409.45,2120.83 U15.17@2389.84,2101.22 ; U15.15 U15.17@2389.84,2081.53 ; U19.21 U19.21@2459.18,-793.35 ; C25.2 2496.54,1981.38 2539.14,1981.38 2545,1987.24 v1(2545,2016.38) ; C24.2 2526.73,2060.39 2533.54,2053.58 2541.94,2053.58 2545,2050.52 v1(2545,2016.38) ; 2545,2031.38 v1(2545,2016.38) ; U9.17@-10,216.95 U9.17 ; U9.17@-10,236.63 U9.17 ; U7.17@-9.61,2125.83 U7.17@10,2106.22 ; U9.17 U9.17@9.69,216.95 ; U9.17@9.69,216.95 U9.17@29.29,197.34 ; U7.17@10,2106.22 U7.17 ; U7.17 U7.17@29.69,2106.22 ; U7.17 U7.17@29.69,2086.53 ; U8.17@460.96,1161.77 U8.17@480.57,1181.38 ; U8.17@480.57,1181.38 U8.17 ; U8.17@480.57,1201.06 U8.17 ; U8.17 U8.17@500.26,1201.06 ; U12.17@1876.77,1157.64 U12.17@1886.61,1167.48 ; U12.17@1886.61,1167.48 U12.17@1896.45,1177.32 ; U12.17@1886.61,1167.48 U12.17@1896.45,1157.64 ; U12.17@1896.45,1177.32 U12.17@1916.06,1196.93 ; U18.17@2340.31,206.95 U18.17 ; U18.17@2340.31,226.63 U18.17 ; U18.17 U18.17@2360,206.95 ; U15.17@2350.55,2120.83 U15.17@2370.16,2101.22 ; U18.17@2360,206.95 U18.17@2379.61,187.34 ; U15.17@2370.16,2101.22 U15.17 ; U15.17 U15.17@2389.84,2101.22 ; U15.17 U15.17@2389.84,2081.53
  other v1: 975,-970 1400,-960 900,-945 1450,-935 2575,-878.62 970,-835 1360,-835 1060,-820 1300,-820 865,-810 1470,-800 2430,-795 2460,-795 1110,-790 1235,-790 2430,-765 2460,-765 575,-689.06 640,-689.06 710,-689.06 925,-655 1090,-650 555,-649.06 1686.54,-645.35 1751.54,-645.35 1821.54,-645.35 1250,-645 1425,-640 1580,-630 555,-584.06 1815,-568.62 905,-565 1000,-555 1145,-550 1250,-545 1666.54,-540.35 1400,-540 1540,-535 705,-521.56 555,-514.06 1816.54,-477.85 1666.54,-470.35 705,-456.56 20,-454.06 85,-454.06 150,-454.06 220,-454.06 285,-454.06 350,-454.06 420,-454.06 485,-454.06 550,-454.06 -40,-449.06 1816.54,-412.85 1131.54,-410.35 1196.54,-410.35 1261.54,-410.35 1331.54,-410.35 1396.54,-410.35 1461.54,-410.35 1531.54,-410.35 1596.54,-410.35 1661.54,-410.35 -110,-409.06 1071.54,-405.35 705,-391.56 1001.54,-365.35 40,-349.06 105,-349.06 170,-349.06 240,-349.06 305,-349.06 370,-349.06 440,-349.06 505,-349.06 570,-349.06 1816.54,-347.85 -25,-344.06 705,-321.56 1151.54,-305.35 1216.54,-305.35 1281.54,-305.35 1351.54,-305.35 1416.54,-305.35 1481.54,-305.35 1551.54,-305.35 1616.54,-305.35 1681.54,-305.35 1086.54,-300.35 -40,-279.06 1816.54,-277.85 105,-269.06 170,-269.06 235,-269.06 305,-269.06 370,-269.06 435,-269.06 505,-269.06 570,-269.06 15,-259.06 705,-256.56 1071.54,-235.35 960,-228.62 1216.54,-225.35 1281.54,-225.35 1346.54,-225.35 1416.54,-225.35 1481.54,-225.35 1546.54,-225.35 1616.54,-225.35 1681.54,-225.35 -125,-224.06 1126.54,-215.35 1816.54,-212.85 705,-191.56 -60,-174.06 45,-164.06 110,-164.06 175,-164.06 245,-164.06 310,-164.06 375,-164.06 445,-164.06 510,-164.06 575,-164.06 1816.54,-147.85 1051.54,-130.35 705,-121.56 1156.54,-120.35 1221.54,-120.35 1286.54,-120.35 1356.54,-120.35 1421.54,-120.35 1486.54,-120.35 1556.54,-120.35 1621.54,-120.35 1686.54,-120.35 1816.54,-77.85 1681.54,-75.35 705,-57.62 570,-54.06 1816.54,-12.85 1681.54,-10.35 570,15.94 705,25.94 1681.54,59.65 1816.54,69.65 423.2,91.4 705,90.94 360,95.94 548.2,96.4 485,100.94 292.38,112.14 1816.54,134.65 1534.74,135.11 1471.54,139.65 1659.74,140.11 1596.54,144.65 222.38,152.14 1403.92,155.84 705,155.94 1333.92,195.84 2331.6,196.6 2366.6,196.6 1816.54,199.65 498.2,201.4 563.2,201.4 613.2,201.4 -18.71,206.6 16.29,206.6 370,205.94 435,205.94 305,210.94 705,225.94 2331.6,236.6 2366.6,236.6 177.38,242.14 1609.74,245.11 1674.74,245.11 1724.74,245.11 -18.71,246.6 16.29,246.6 1481.54,249.65 1546.54,249.65 1416.54,254.65 1816.54,269.65 290,275.94 1288.92,285.84 435,285.94 500,285.94 565,285.94 615,285.94 705,290.94 345,295.94 75,310 2315,315 1401.54,319.65 1546.54,329.65 1611.54,329.65 1676.54,329.65 1726.54,329.65 1816.54,334.65 -35,335 207.38,337.14 1456.54,339.65 705,355.94 1318.92,380.84 272.38,387.14 573.2,391.4 433.2,396.4 510,395.94 1816.54,399.65 370,400.94 2450,405 -35,420 705,421.88 75,430 1383.92,430.84 2330,430 1684.74,435.11 1621.54,439.65 1544.74,440.11 1481.54,444.65 575,445.94 1816.54,469.65 2444.29,486.56 1686.54,489.65 705,490.94 -40.71,501.56 75,505 575,515.94 1816.54,534.65 2330,535 710,540.94 1686.54,559.65 575,580.94 1821.54,584.65 2435,590 -35,605 70,605 710,605.94 1686.54,624.65 1821.54,649.65 535,655.94 460,660.94 710,670.94 2325,675 2425,685 -30,695 1646.54,699.65 70,700 390,700.94 1571.54,704.65 1821.54,714.65 710,740.94 1501.54,744.65 545,760.94 610,760.94 480,765.94 1821.54,784.65 2325,785 345,790.94 2429.29,801.56 1656.54,804.65 1721.54,804.65 710,805.94 1591.54,809.65 -40.71,821.56 73.3,828.65 465,830.94 1456.54,834.65 610,840.94 1821.54,849.65 520,850.94 260,865 2095,870 710,870.94 1576.54,874.65 1721.54,884.65 375,885.94 2320,890 2425,890 1631.54,894.65 -45,910 2205,910 1821.54,914.65 65,915 160,915 2020,920 1486.54,929.65 440,935.94 710,940.94 515,955.94 2120,960 575,960.94 1815.34,978.46 1551.54,979.65 2220,980 1626.54,999.65 1686.54,1004.65 2320,1005 2005,1015 2430,1015 1898,1025 60,1030 372.26,1034.12 -40,1035 235,1035 115,1045 280,1045 705,1045.51 1691.54,1054.65 2255,1055 2150,1060 2100,1090 2320,1105 700,1105.94 55,1110 2180,1115 1691.54,1124.65 2005,1125 2424.29,1126.56 365,1130 185,1135 1866.8,1148.92 1906.8,1148.92 2100,1150 275,1155 -50.71,1161.56 470.22,1174.78 510.22,1174.78 2265,1180 1866.8,1183.92 1906.8,1183.92 110,1185 1691.54,1189.65 470.22,1209.78 510.22,1209.78 185,1226.1 2005,1230 2190,1230 380,1235 2420,1250 2315,1255 50,1265 2105,1265 275,1275 -55,1285 2150,1295 230,1300 2000,1305 2315,1315 115,1320 2115,1325 380,1345 -45,1385 55,1385 270,1390 2215,1410 2010,1430 160,1445 375,1450 2191.04,1466.45 2310,1475 2045,1480 2120,1490 300,1495 2414.29,1496.56 55,1500 -55.71,1511.56 2310,1585 2410,1620 -60,1635 55,1635 2305,1690 2415,1740 -55,1755 50,1755 2305,1805 2404.29,1866.56 -65.71,1881.56 55,1885 2295,1910 2290,1965 45,2000 -70,2005 2363.56,2071.57 2398.56,2071.57 3.4,2076.57 38.4,2076.57 2363.56,2111.57 2398.56,2111.57 3.4,2116.57 38.4,2116.57 2310,2175 2420,2175 -55,2185 75,2185 2310,2260 2425,2260 -50,2270 75,2275
NetC3_1: C3.1 U1.1 | length 196.9
  Bottom Layer w11.55: C3.1@659.41,705.04 U1.1@659.41,901.89
NetC3_2: C3.2 U2.3 | length 48.1
  Bottom Layer w11.55: C3.2 660.3,673.92 660.3,626.67 U2.3
NetC4_1: C4.1 U8.4 | length 54.3
  Bottom Layer w11.55: U8.4 552.88,1161.69 553.19,1161.38 C4.1
NetC4_2: C4.2 U1.5 | length 190
  Bottom Layer w11.55: U1.5 C4.2@635,1161.38
NetC5_1: C5.1 U2.5 | length 59.6
  Bottom Layer w11.55: C5.1 U2.5
NetC5_2: C5.2 U3.5 | length 46.1
  Bottom Layer w11.55: U3.5 C5.2
NetC6_1: C6.1 U1.3 | length 529.7
  Bottom Layer w11.55: 497.99,901.89 U1.3@608.23,901.89 ; 499.17,901.89 ccw(c499.17,803.46) 499.17,705.04 C6.1@609.41,705.04
NetC6_2: C6.2 U2.1 | length 49.7
  Bottom Layer w11.55: C6.2 607.31,671.9 607.31,628.48 U2.1
NetC7_1: C7.1 U7.4 | length 53.1
  Bottom Layer w11.55: C7.1 -10.16,2033.44 -9.68,2033.91 U7.4
NetC7_2: C7.2 C19.2 R5.1 R5.2 U8.10 | length 3032.8
  Bottom Layer w5.5: R5.1@8.66,1160.83 cw(c9.47,970.55) 199.37,982.72 ; R5.2@10.18,1205.14 ccw(c10.99,1395.43) 200.89,1383.26 ccw(c190.91,1383.9) 200.9,1384.25 cw(c262.93,1386.45) 325,1387.03 325,1183.08 ; 199.38,981.73 ccw(c261.41,979.53) 323.48,978.95 323.48,1184.6
  Bottom Layer w11.55: C7.2 5.97,1205.05 R5.2@6.12,1198.11 ; R5.1@6.93,1160.8 6.94,1160.08 7.07,1154.2 R5.1@7.09,1153.16 ; R5.1@8.19,1154.23 8.94,1119.62 C19.2 ; 326.7,1181.38 U8.10
NetC8_1: C8.1 TP1.A | length 131.1
  Bottom Layer w11.55: TP1.A@-5,2356.38 9.84,2341.53 C8.1
NetC8_2: C8.2 U7.10 | length 46.2
  Bottom Layer w11.55: C8.2 9.92,2197.83 9.92,2151.87 U7.10
NetC9_1: C9.1 U3.1 | length 196.9
  Bottom Layer w11.55: C9.1@659.41,149.72 U3.1@659.41,346.57
NetC9_2: C9.2 U4.3 | length 51.9
  Bottom Layer w11.55: U4.3 655,71.97 655,115.94 C9.2
NetC10_1: C10.1 U4.5 | length 52.8
  Bottom Layer w11.55: C10.1 U4.5
NetC10_2: C10.2 U5.5 | length 52.8
  Bottom Layer w11.55: U5.5 C10.2
NetC13_1: C13.1 U3.3 | length 860.4
  Bottom Layer w11.55: 328.82,346.57 ccw(c328.82,248.15) 328.82,149.72 C13.1@604.41,149.72 ; 332.64,346.57 U3.3@608.23,346.57
NetC13_2: C13.2 U4.1 | length 44.7
  Bottom Layer w11.55: C13.2 602.31,111.9 602.31,73.48 U4.1
NetC14_1: C14.1 U5.1 | length 196.9
  Bottom Layer w11.55: C14.1@655,-405.59 U5.1@655,-208.74
NetC14_2: C14.2 U6.3 | length 53.1
  Bottom Layer w11.55: C14.2 655.3,-436.08 655.3,-488.33 U6.3
NetC15_1: C15.1 U6.5 | length 61.6
  Bottom Layer w11.55: U6.5 632.1,-561.59 632.1,-616.15 C15.1
NetC15_2: C15.2 C35.2 P1.1 R8.1 R8.2 | length 2577.2
  Bottom Layer w5.5: R8.2@1149.93,-601.87 cw(c959.64,-602.67) 971.82,-792.57 cw(c971.18,-782.59) 970.82,-792.58 ccw(c968.63,-854.61) 968.04,-916.68 1172,-916.68 ; 1170.47,-915.16 1376.13,-915.16 ccw(c1375.55,-853.09) 1373.35,-791.06 cw(c1372.99,-781.07) 1372.35,-791.05 cw(c1384.53,-601.15) R8.1@1194.24,-600.34
  Bottom Layer w11.55: C15.2 1149.8,-598.82 R8.2@1155.9,-598.56 ; P1.1@1173.7,-1108.62 1173.7,-918.38 ; R8.1@1189.31,-597.16 1191.46,-597.07 1194.1,-596.96 C35.2
NetC16_1: C16.1 U5.3 | length 1529.7
  Bottom Layer w11.55: -6.42,-208.74 U5.3@603.82,-208.74 ; -5.24,-208.74 ccw(c-5.24,-307.17) -5.24,-405.59 C16.1@605,-405.59
NetC16_2: C16.2 U6.1 | length 53.1
  Bottom Layer w11.55: U6.1 604.7,-488.33 604.7,-436.08 C16.2
NetC19_1: C19.1 U9.4 | length 59.3
  Bottom Layer w11.55: C19.1 29.11,335.54 29.11,282.47 U9.4
NetC20_1: C20.1 TP2.A | length 175.5
  Bottom Layer w11.55: TP2.A 5,5 5,81.38 C20.1 ; TP2.A@10,-43.62 TP2.A@10,41.38
NetC20_2: C20.2 U9.10 | length 51.7
  Bottom Layer w11.55: U9.10 9.84,171.22 9.84,120 C20.2
NetC23_1: C23.1 U10.1 | length 196.3
  Bottom Layer w11.55: C23.1 1771.83,748.41 1771.83,943.92 U10.1
NetC23_2: C23.2 U11.3 | length 44.8
  Bottom Layer w11.55: C23.2 1771.83,714.36 1771.83,670.38 U11.3
NetC26_1: C26.1 U12.4 | length 49.1
  Bottom Layer w11.55: C26.1 1783.39,1195.7 1829.56,1195.7 U12.4
NetC26_2: C26.2 U10.5 | length 184.9
  Bottom Layer w11.55: U10.5 C26.2@1746.54,1200
NetC27_1: C27.1 U11.5 | length 54.9
  Bottom Layer w11.55: U11.5 1748.63,597.12 1748.63,549.28 C27.1
NetC27_2: C27.2 U13.5 | length 54.9
  Bottom Layer w11.55: U13.5 1748.63,462.18 1748.63,510.02 C27.2
NetC28_1: C28.1 U10.3 | length 529.7
  Bottom Layer w11.55: 1609.53,945.6 1610.71,945.6 ; U10.3@1719.76,945.6 1610.71,945.6 ; C28.1@1720.94,748.75 1610.71,748.75 cw(c1610.71,847.17) 1610.71,945.6
NetC28_2: C28.2 U11.1 | length 44.8
  Bottom Layer w11.55: U11.1 1721.24,670.38 1721.24,714.36 C28.2
NetC29_1: C29.1 U15.4 | length 49.8
  Bottom Layer w5: C29.1 C29.1@2350.47,1986.85
  Bottom Layer w11.55: C29.1@2350.47,1986.85 U15.4
NetC29_2: C29.2 C39.2 R13.1 R13.2 U12.10 | length 3050.6
  Bottom Layer w5.5: 2050.65,1177.45 2050.65,1381.4 cw(c2112.71,1380.82) 2174.74,1378.62 ; 2052.17,1178.97 2052.17,973.32 ccw(c2114.23,973.9) 2176.27,976.1 cw(c2186.26,976.45) 2176.28,977.09 cw(c2366.18,964.92) R13.1@2366.98,1155.2 ; 2174.76,1377.63 ccw(c2364.66,1389.8) R13.2@2365.46,1199.51
  Bottom Layer w11.55: U12.10 2048.95,1175.75 ; C29.2 R13.2@2366.3,1195.31 ; R13.1@2367.02,1161.86 R13.1@2367.1,1158.34 ; R13.1@2367.25,1158.35 2384.51,356.47 C39.2@2384.51,356.37
NetC30_1: C30.1 TP3.A | length 134.1
  Bottom Layer w11.55: C30.1 TP3.A@2370,2362.2
NetC30_2: C30.2 U15.10 | length 47.9
  Bottom Layer w5: C30.2 C30.2@2370.16,2194.49
  Bottom Layer w11.55: U15.10 C30.2@2370.16,2194.49
NetC31_1: C31.1 U13.1 | length 197.8
  Bottom Layer w11.55: C31.1 1762.52,196.38 1768.56,202.42 1768.56,203.4 1772.13,206.98 U13.1
NetC31_2: C31.2 U14.3 | length 50.2
  Bottom Layer w11.55: C31.2 1765.03,159.43 1765.03,117.18 U14.3
NetC32_1: C32.1 U14.5 | length 52.8
  Bottom Layer w11.55: C32.1 U14.5
NetC32_2: C32.2 U16.5 | length 52.8
  Bottom Layer w11.55: U16.5 C32.2
NetC33_1: C33.1 U13.3 | length 860.4
  Bottom Layer w11.55: 1440.35,390.28 ccw(c1440.35,291.86) 1440.35,193.43 C33.1@1715.94,193.43 ; 1444.17,390.28 U13.3@1719.76,390.28
NetC33_2: C33.2 U14.1 | length 46.3
  Bottom Layer w11.55: U14.1 1716.24,115.38 1716.24,160.89 C33.2
NetC34_1: C34.1 U16.1 | length 201.9
  Bottom Layer w11.55: C34.1 1761.54,-181.21 1767.13,-175.62 U16.1
NetC34_2: C34.2 U17.3 | length 48.4
  Bottom Layer w11.55: C34.2 1765.03,-402.3 1765.03,-442.82 U17.3
NetC35_1: C35.1 U17.5 | length 59.6
  Bottom Layer w11.55: C35.1 U17.5
NetC36_1: C36.1 U16.3 | length 1529.7
  Bottom Layer w11.55: 1105.12,-165.03 U16.3@1715.35,-165.03 ; 1106.3,-165.03 ccw(c1106.3,-263.46) 1106.3,-361.88 C36.1@1716.54,-361.88
NetC36_2: C36.2 U17.1 | length 46.3
  Bottom Layer w11.55: U17.1 1716.24,-444.62 1716.24,-399.11 C36.2
NetC39_1: C39.1 U18.4 | length 50.8
  Bottom Layer w11.55: U18.4 2379.69,276.06 2380,276.38 C39.1
NetC40_1: C40.1 TP4.A | length 163.8
  Bottom Layer w5: C40.1 C40.1@2362.2,82.44
  Bottom Layer w11.55: TP4.A C40.1@2362.2,82.44 ; TP4.A@2375,-43.62 TP4.A@2375,34.65
NetC40_2: C40.2 U18.10 | length 43.3
  Bottom Layer w11.55: C40.2 U18.10
NetP2_2: P2.2 U19.8 | length 291.7
  Bottom Layer w5: P2.2 2345,-1008.62 2443.43,-910.19 U19.8
NetP2_3: P2.3 U19.9 | length 331.3
  Bottom Layer w5: P2.3 2253.15,-1083.62 2427.68,-909.09 U19.9
NetR1_1: R1.1 U8.5 | length 58.9
  Bottom Layer w11.55: U8.5 519.94,1098.17 R1.1
NetR2_1: R2.1 U8.6 | length 62.4
  Bottom Layer w11.55: R2.1@480.98,1081.38 500.26,1100.65 U8.6
NetR3_1: R3.1 U7.5 | length 64.8
  Bottom Layer w5: R3.1 -93.42,2052.36 -78.94,2066.85 U7.5
NetR4_1: R4.1 U7.6 | length 65.6
  Bottom Layer w5: R4.1 -94.33,2100.77 -80.1,2086.53 U7.6
NetR6_1: R6.1 U9.5 | length 71.9
  Bottom Layer w5: U9.5 99.19,256.32 118.27,275.39 R6.1
NetR7_1: R7.1 U9.6 | length 69.9
  Bottom Layer w5: U9.6 104,236.63 118.27,222.36 R7.1@118.27,221.38
NetR9_1: R9.1 U12.5 | length 75
  Bottom Layer w5: R9.1 1832.59,1285.75 1855.71,1262.63 U12.5
NetR10_1: R10.1 U12.6 | length 68.8
  Bottom Layer w5: U12.6 1875.39,1281.44 1881.43,1287.48 R10.1
NetR11_1: R11.1 U15.5 | length 83.6
  Bottom Layer w5: R11.1 2250,2042.36 2269.49,2061.85 U15.5
NetR12_1: R12.1 U15.6 | length 79
  Bottom Layer w5: R12.1 2250,2090.85 2259.31,2081.53 U15.6
NetR14_1: R14.1 U18.5 | length 78.9
  Bottom Layer w5: U18.5 2413.15,246.32 2428.21,261.38 R14.1
NetR15_1: R15.1 U18.6 | length 77.9
  Bottom Layer w5: U18.6 2462.26,226.63 2476.54,212.36 R15.1
RXEN: R2.2 R4.2 R7.2 R10.2 R12.2 R15.2 U19.12 | length 12230.2
  Top Layer w5: v1(2550,211.38) v1@2552.5,213.88
  Layer 1 w5: v1(-225,141.38) v1(105,141.38) ; v1(-220,-878.62) -201.46,-897.16 ccw(c-197.93,-893.62) -197.93,-898.62 v1@2224.9,-898.62 ; v1(-220,966.38) 405,966.38 v1(440,1001.38) ; v1(1880,1351.38) v1(2800,1351.38) ; v1(2215,2136.38) v1@2650,2136.38 ; v1(2225,-888.62) 2225,-898.62 2790,-898.62 v1(2800,-888.62) ; v1@2552.5,213.88 v1@2800,213.88
  Bottom Layer w5: v1(-220,-878.62) v1(-220,966.38) -220,2076.38 -194.63,2101.75 R4.2 ; v1(105,141.38) 120,156.38 R7.2 ; v1(440,1001.38) 443.64,1005.01 443.64,1012.53 479.02,1047.91 R2.2 ; v1(1880,1351.38) 1880,1322.55 R10.2 ; v1(2215,2136.38) 2215,2092.91 R12.2 ; v1(2225,-888.62) 2320.27,-793.35 U19.12 ; R15.2 v1(2550,211.38) ; v1@2650,2136.38 2800,1986.38 v1(2800,1351.38) v1(2800,216.38) v1(2800,-888.62)
  other v1: 2652.7,2135.87
TXEN: R1.2 R3.2 R6.2 R9.2 R11.2 R14.2 U19.11 | length 11823.2
  Layer 1 w5: v1(-185,-858.62) -182.5,-856.12 v1(2310,-856.12) 2757.5,-856.12 v1(2760,-853.62) ; v1(-185,361.38) 105,361.38 v1(110,356.38) ; v1(-180,936.38) 389.14,936.38 428.21,975.44 529.07,975.44 v1(570,1016.38) ; v1(1820,1381.38) v1(2760,1381.38) ; v1(2220,1991.38) v1(2715,1991.38) ; v1(2550,261.38) v1(2760,261.38)
  Bottom Layer w5: v1(-185,-858.62) -185,1992.28 -126.89,2050.39 R3.2 ; v1(110,356.38) 110,351.24 118.27,342.97 R6.2 ; R1.2@535.98,1049.65 v1@569.25,1016.38 ; v1(1820,1381.38) 1820,1378.01 1831.61,1366.4 R9.2 ; R11.2 2220,2037.91 v1(2220,1991.38) ; v1(2310,-856.12) 2357.02,-809.1 U19.11 ; R14.2 v1(2550,261.38) ; v1(2715,1991.38) 2760,1946.38 v1(2760,1381.38) v1(2760,-853.62)
  Bottom Layer w11.55: R1.2 R1.2@535.98,1049.65 ; v1@569.25,1016.38 v1(570,1016.38)
VCC_3V3: C1.1 C2.1 C11.1 C12.1 C17.1 C18.1 C21.1 C22.1 C24.1 C25.1 C37.1 C38.1 C41.1 C42.1 P2.1 U7.16 U8.16 U9.16 U12.16 U15.16 U18.16 U19.5 | length 1103
  Bottom Layer w10: C18.1 -106.63,309.74 -106.63,258.01 C17.1 v1(-105,211.38) ; C17.1 U9.16@-55.6,256.35 ; U7.16 75.77,2066.34 124.88,2066.34 C12.1 ; C11.1 127.34,2010.61 127.34,2058.88 C12.1 ; v1(130,2111.38) 129.92,2111.3 129.92,2061.46 C12.1 ; U8.16 519.94,1254.21 525,1259.27 C1.1 ; C1.1@525.87,1295.51 579.13,1295.51 C2.1 v1(625,1296.38) ; U12.16 1855.71,1072.4 C22.1@1870.62,1057.48 ; C22.1 C21.1 v1(1971.61,1057.48) ; v1(2240,351.38) 2240.87,350.51 2240.87,302.24 C38.1 2243.37,299.74 2243.37,248.01 C37.1 ; C37.1 U18.16@2294.71,246.35 ; U15.16 2435.65,2061.61 C24.1@2493.03,2061.61 ; v1(2490,2101.38) 2491.63,2099.74 2491.63,2063.01 C24.1@2493.03,2061.61 ; C25.1 2494.13,2017.24 2494.13,2060.51 C24.1 C24.1@2493.03,2061.61 ; U19.5 2605.48,-809.1 C41.1 2625,-808.62 v1(2670,-808.62)
pads on no net: Designator49.1 Designator50.1 Designator51.1 Designator52.1 U7.13 U7.14 U8.13 U8.14 U9.13 U9.14 U12.13 U12.14 U15.13 U15.14 U18.13 U18.14 U19.6 U19.10

## Polygon pours and split planes (outlines as drawn)
GND on Top Layer "GND_L01_P000" (solid, pour order 0): -1180,3765 -1180,-955 -210,-955 -205,-950 -205,-1345 2795,-1345 2790,-1340 2790,-965 3540,-965 3545,-960 3530,-945 3530,3775
VCC_3V3 on Layer 1 "VCC_3V3_L02_P001" (solid, pour order 1): -1166.85,3773.36 -1166.85,-946.64 -196.85,-946.64 -191.85,-941.64 -191.85,-1336.64 2808.15,-1336.64 2803.15,-1331.64 2803.15,-956.64 3553.15,-956.64 3558.15,-951.64 3543.15,-936.64 3543.15,3783.36
GND on Layer 2 "GND_L03_P002" (solid, pour order 2): -1175,3770 -1175,-950 -205,-950 -200,-945 -200,-1340 2800,-1340 2795,-1335 2795,-960 3545,-960 3550,-955 3535,-940 3535,3780
GND on Bottom Layer "GND_L04_P003" (solid, pour order 3): -1189.3,3758.69 -1189.3,-961.31 -219.3,-961.31 -214.3,-956.31 -214.3,-1351.31 2785.7,-1351.31 2780.7,-1346.31 2780.7,-971.31 3530.7,-971.31 3535.7,-966.31 3520.7,-951.31 3520.7,3768.69

## Other copper
Bottom Layer:
  region net GND: 1821.54,984.65 1691.71,984.65 1691.71,969.65 1821.54,969.65
  region net GND: 1820.94,641.08 1680.94,641.08 1680.94,626.08 1820.94,626.08
  region net GND: 1821.54,429.65 1696.54,429.65 1696.54,414.65 1821.54,414.65
  region net GND: 1816.54,84.65 1676.54,84.65 1676.54,69.65 1816.54,69.65
  region net GND: 1816.54,-140.35 1676.54,-140.35 1676.54,-125.35 1816.54,-125.35
  region net GND: 1816.54,-485.35 1676.54,-485.35 1676.54,-470.35 1816.54,-470.35
  region net GND: 1656.54,993.31 1701.54,993.31 1701.54,981.68 1656.54,981.68
  region net GND: 1686.54,419.65
  region net GND: 1681.89,438 1701.54,438 1701.54,426.37 1681.89,426.37
  region net GND: 710,940.94 580.18,940.94 580.18,925.94 710,925.94
  region net GND: 709.41,597.37 569.41,597.37 569.41,582.37 709.41,582.37
  region net GND: 710,385.94 585,385.94 585,370.94 710,370.94
  region net GND: 705,40.94 565,40.94 565,25.94 705,25.94
  region net GND: 705,-184.06 565,-184.06 565,-169.06 705,-169.06
  region net GND: 705,-529.06 565,-529.06 565,-514.06 705,-514.06
  region net GND: 545,949.61 590,949.61 590,937.97 545,937.97
  region net GND: 570.35,394.29 590,394.29 590,382.66 570.35,382.66
  region net GND: 575,375.94

## Silkscreen, mask and mechanical layers (free items; w line width, h text height)
Top Overlay:
  lines w10: -1184.41,3769.33 3547.04,3769.33 ; -1180,-953.62 3551.45,-953.62
Top Solder:
  rectangle: -1190,-960 3550,3765
Mechanical 1:
  lines w10: -1180,-1347.32 -1180,4164.49 3544.41,4164.49 3544.41,-1347.32 -1180,-1347.32 ; -1175,-1347.32 -1175,4164.49 3549.41,4164.49 3549.41,-1347.32 -1175,-1347.32

## Text inside footprints (layer, text, board x,y; h text height)
TP1: Mechanical 11 "A" at 10,2362.2 h25
TP2: Mechanical 11 "A" at 10,0 h25
TP3: Mechanical 11 "A" at 2372.2,2362.2 h25
TP4: Mechanical 11 "A" at 2372.2,0 h25